# Altium PCB epic2.PcbDoc
Units mm, origin at the board's own origin, x right, y up, seen from the top; angles counter-clockwise.
Board outline 52 x 53 mm, 2 copper layers (Top Layer, Bottom Layer); 61 components, 51 nets, 244 pads, 192 vias.
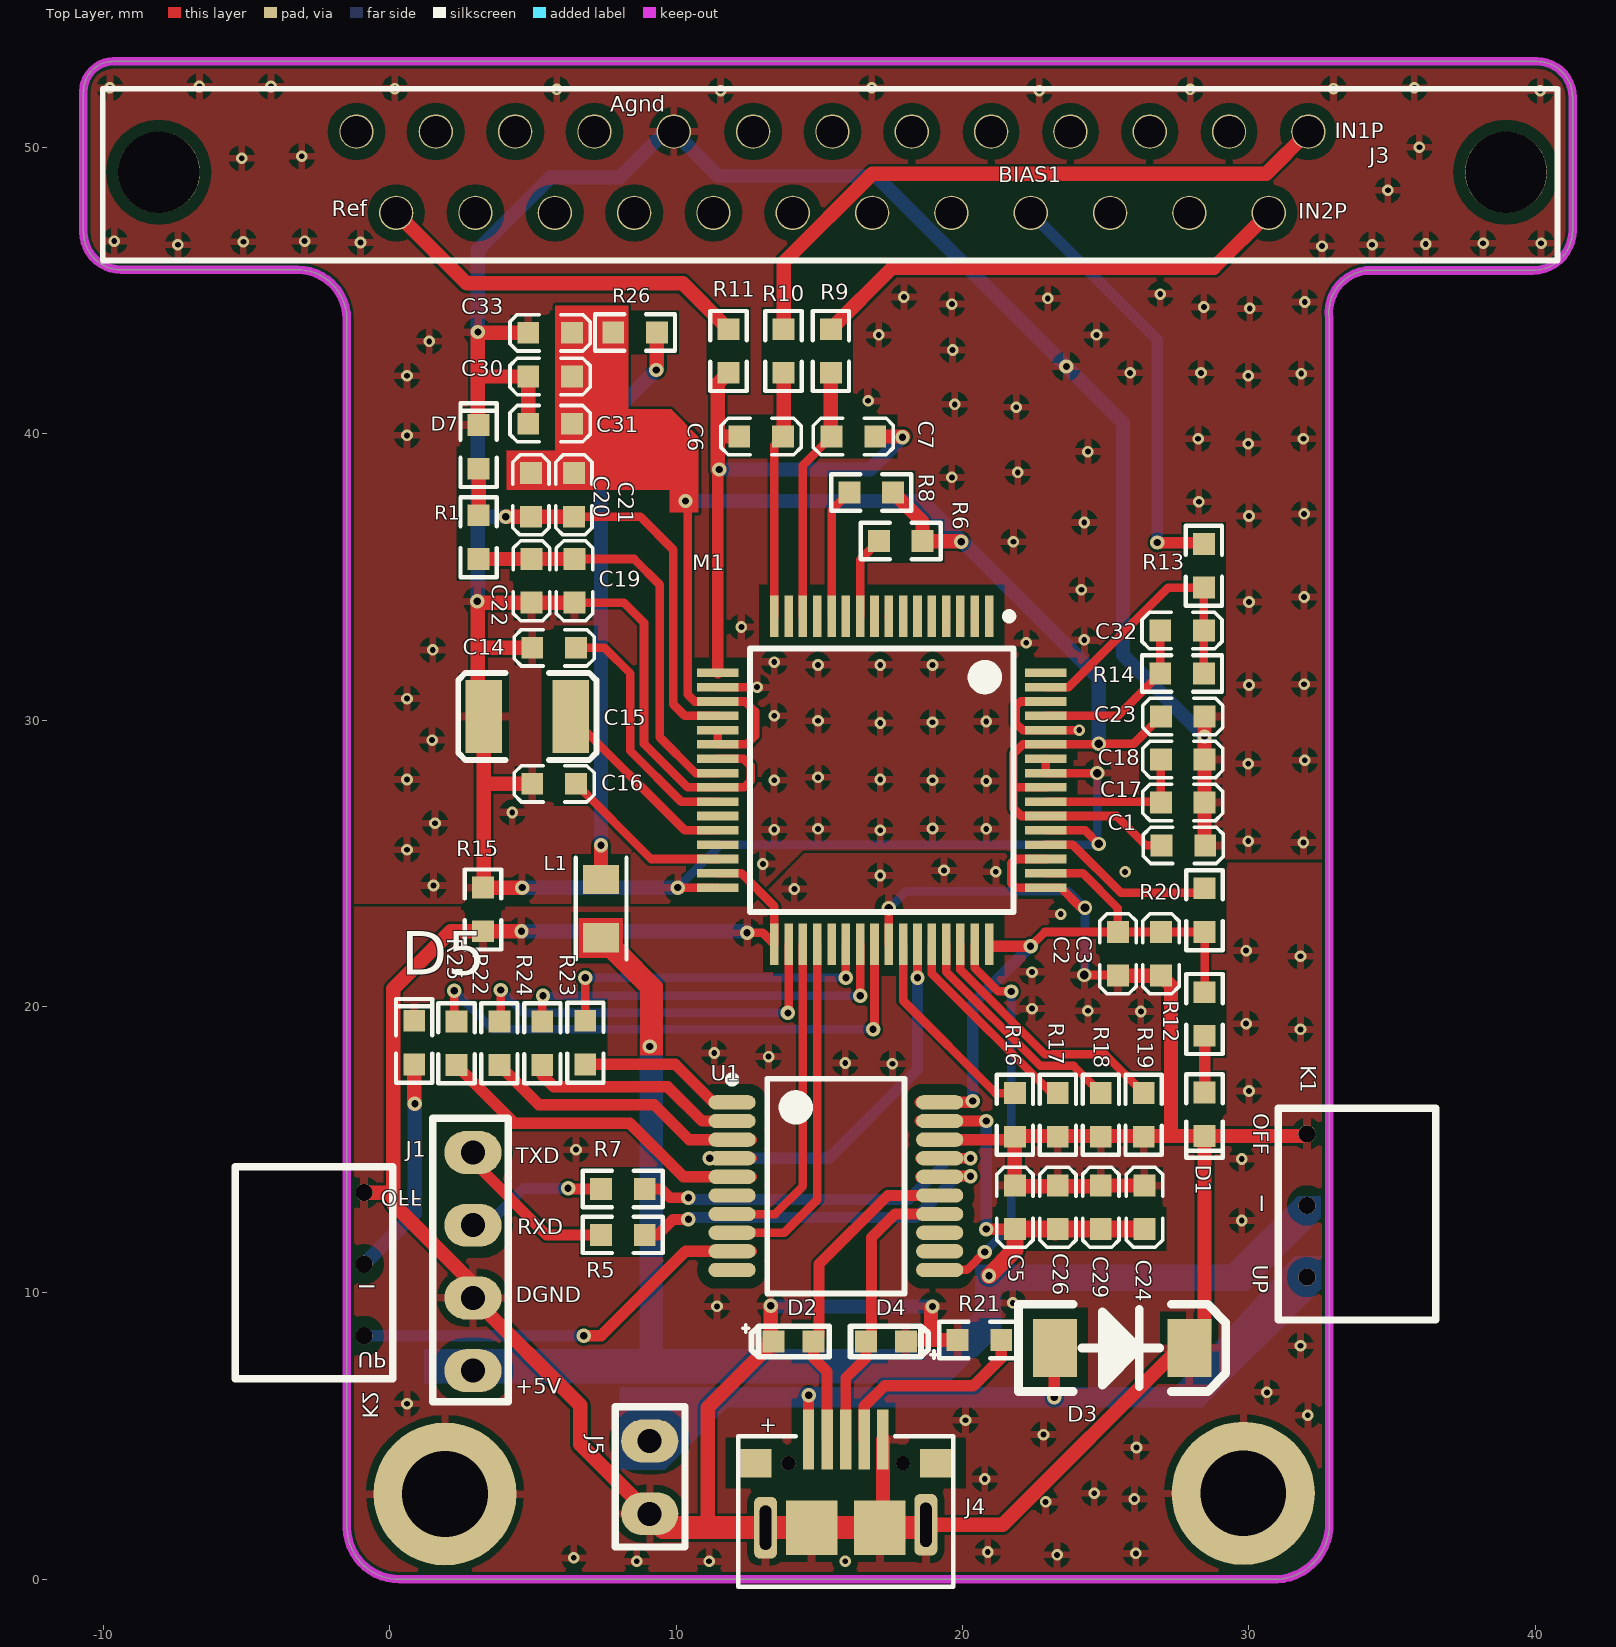
[diagram p0: Top Layer view]
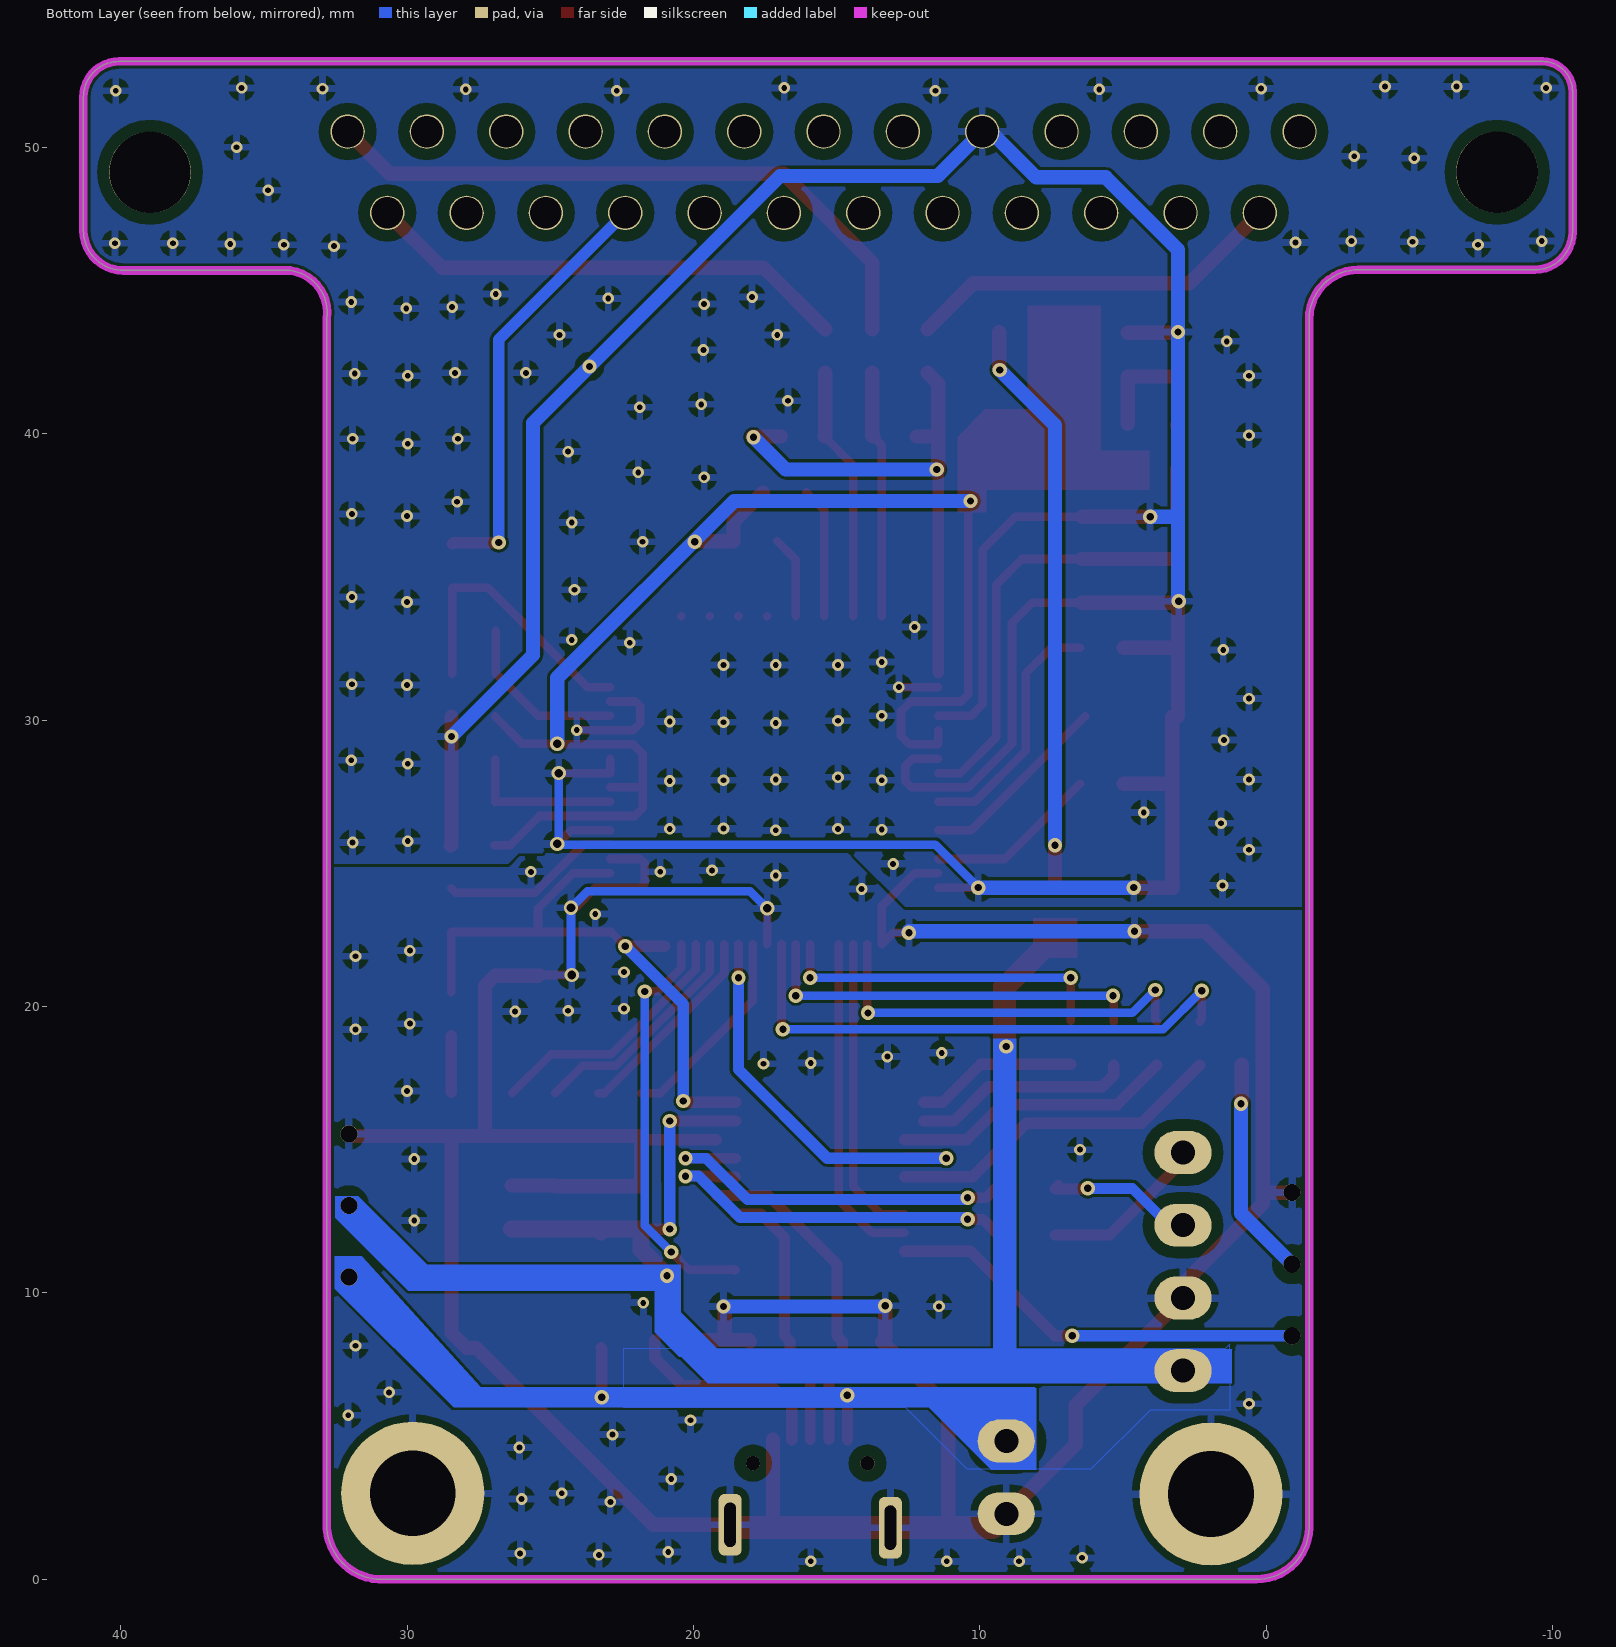
[diagram p1: Bottom Layer view, seen from below]
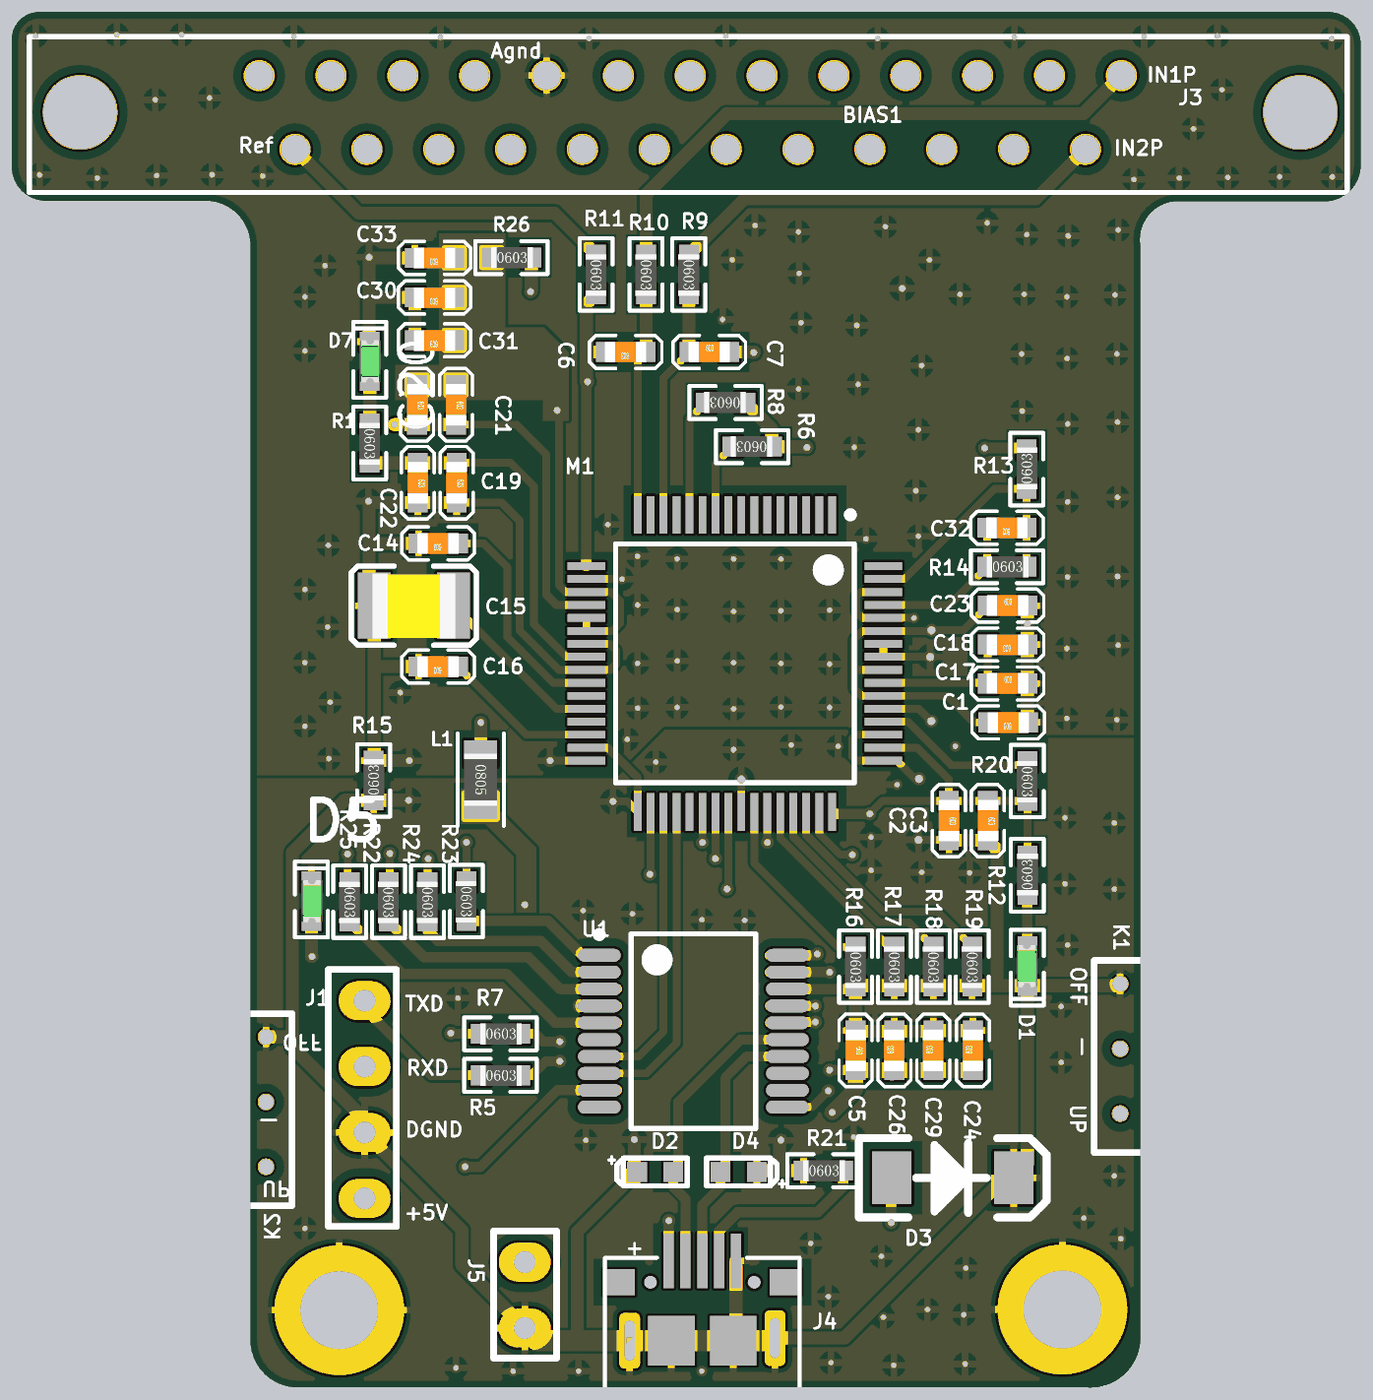
[diagram p2: 3D render of the assembled board from above, using the file's embedded part models]

## Layer stack, top to bottom
Top Solder: solder mask 0.0102, Solder Resist, Dk 3.5
Top Layer: signal copper 0.0356
Dielectric 1: dielectric 0.32, FR-4, Dk 4.8
Bottom Layer: signal copper 0.0356
Bottom Solder: solder mask 0.0102, Solder Resist, Dk 3.5

## Board outline
-1.5,44 ccw(c-3.225,44) -3.225,45.725 -9.375,45.725 cw(c-9.375,47.05) -10.7,47.05 -10.7,51.95 cw(c-9.65,51.95) -9.65,53 40.05,53 cw(c40.05,51.75) 41.3,51.75 41.3,47.1 cw(c39.9,47.1) 39.9,45.7 34.075,45.7 ccw(c34.275,44.225) 32.8,44.025 32.8,1.775 cw(c30.888,1.913) 30.75,0 0.35,0 cw(c0.325,1.825) -1.5,1.8

## Design rules (kind name [scope] priority, off if disabled: settings)
Clearance [All] p1: gap=0.1 except(0.4: SMDPad-Poly THPad-Poly)
HoleToHoleClearance [All] p1: gap=0 allowstackedmicrovias=TRUE
MinimumSolderMaskSliver [All] p1: minsoldermaskwidth=0
PlaneConnect [ISVIA] p1: planeconnectstyle=Relief reliefexpansion=0.508 reliefentries=4 reliefconductorwidth=0.254 reliefairgap=0.254
PolygonConnect [All] p1: connectstyle=Relief reliefconductorwidth=0.254 reliefentries=4 polygonreliefangle="90 Angle" airgapwidth=0.254
RoutingVias [All] p1: holewidth=0.254 width=0.5 viastyle="Through Hole" minholewidth=0.254 minwidth=0.5 maxholewidth=0.3 maxwidth=0.8
SilkToSilkClearance [All] p1: silktosilkclearance=0
SilkToSolderMaskClearance [IsPad] p1: minsilkscreentomaskgap=0 clearancetoexposedcopper=TRUE
SolderMaskExpansion [All] p1: expansion=0.102
Width [All] p1: maxlimit=0.8 minlimit=0.254 preferedwidth=0.5
25 further rules are at their usual default settings.

## Components (designator, comment, footprint, x,y, rotation, side; value= is the part's Value field where it differs from the comment)
C1 "105K16V" C0603 28.473,25.625 r180 top
C2 "104K50V" C0603 25.425,22.601 r270 top
C3 "105K16V" C0603 26.925,22.601 r270 top
C5 "105K16V" C0603 21.825,13.75 r270 top
C6 "101K10V" C0603 13.725,39.9 r180 top
C7 "101K10V" C0603 15.425,39.9 r0 top
C14 "105K16V" C0603 6.499,32.525 r180 top
C15 "100Uf" C1210 6.323,30.125 r180 top
C16 "105K16V" C0603 6.499,27.775 r180 top
C17 "105K16V" C0603 26.925,27.125 r0 top
C18 "104K50V" C0603 28.449,28.625 r180 top
C19 "106K50V" C0603 6.449,35.625 r270 top
C20 "105K16V" C0603 4.925,38.625 r270 top
C21 "104K50V" C0603 6.425,38.625 r270 top
C22 "104K50V" C0603 4.949,35.625 r270 top
C23 "105K16V" C0603 26.925,30.125 r0 top
C24 "106K50V" C0603 26.35,12.226 r90 top
C26 "104K50V" C0603 23.325,12.226 r90 top
C29 "104K50V" C0603 24.825,12.226 r90 top
C30 "103K50V" C0603 6.357,42 r180 top
C31 "106K50V" C0603 6.357,40.35 r180 top
C32 "152K16V" C0603 28.425,33.125 r180 top
C33 "103K50V" C0603 6.357,43.525 r180 top
D1 "LED0603G" D-LED0603G 28.449,16.999 r270 top
D2 "ESDA_TR1/0603" HS_0603D 14.1,8.3 r0 top
D3 "SMAJ5.0CA" DO-214 23.225,8.075 r0 top
D4 "ESDA_TR1/0603" HS_0603D 17.324,8.3 r180 top
D5 "LED0603G" D-LED0603G 0.85,17.976 r90 top
D7 "LED0603G" D-LED0603G 3.1,38.776 r90 top
J1 "J-D2.45-1*4" D2.54-1*4P 2.9,14.9 r270 top
J3 "C-DSUB-25" C-DSUB-25 38.975,49.13 r180 top
J4 "USB-MINI-SOCKET" "MICRO-USB - 5.9" 12.169,-0.257 r0 top
J5 "J-D2.54-1*2" D2.54-1*2P 9.075,4.825 r270 top
K1 "SS-12D00" SS-12D00 32.025,15.55 r270 top
K2 "SS-12D00" SS-12D00 -0.9,13.5 r270 top
L1 "10uH" L0805 7.375,24.432 r270 top
M1 "ADS1299" ADS1299-TSQFP50P1200X1200X105-64N 17.175,27.9 r270 top
R1 "3KF" R0603 3.1,37.15 r270 top
R5 "22RF" R0603 7.376,12.025 r0 top
R6 "10KF" R0603 18.6,36.25 r180 top
R7 "22RF" R0603 7.376,13.625 r0 top
R8 "10KF" R0603 17.575,37.95 r180 top
R9 "10KF" R0603 15.4,43.65 r270 top
R10 "10KF" R0603 13.75,43.65 r270 top
R11 "10KF" R0603 11.825,43.65 r270 top
R12 "2KF" R0603 28.449,18.975 r90 top
R13 "10KF" R0603 28.425,34.625 r90 top
R14 "1MF" R0603 26.901,31.625 r0 top
R15 "0R" R0603 3.25,22.625 r90 top
R16 "10KF" R0603 21.825,16.975 r270 top
R17 "10KF" R0603 23.325,16.975 r270 top
R18 "10KF" R0603 24.825,16.975 r270 top
R19 "10KF" R0603 26.325,16.975 r270 top
R20 "2KF" R0603 28.449,24.125 r270 top
R21 "0R" R0603 19.825,8.35 r0 top
R22 "1KF" R0603 3.825,19.475 r270 top
R23 "1KF" R0603 6.825,19.5 r270 top
R24 "1KF" R0603 5.325,19.475 r270 top
R25 "1KF" R0603 2.325,19.475 r270 top
R26 "1RJ" R0603 7.8,43.538 r0 top
U1 "CH559T" TSSOP20 15.575,13.725 r0 top

## Footprints (in the part's own frame and the unit in brackets; to place one, negate y for a bottom-side part, rotate by r counter-clockwise, add the part's x,y. Pads: shape width x height; smd on the part's side, far side on the other; paste and mask are expansions set on the pad)
ADS1299-TSQFP50P1200X1200X105-64N [mm] "TSQFP, 64-Leads, Body 10.00x10.00mm, Pitch 0.50mm, IPC Medium Density"
  rect 1.45x0.3 smd: 1(-5.725,3.75) 2(-5.725,3.25) 3(-5.725,2.75) 4(-5.725,2.25) 5(-5.725,1.75) 6(-5.725,1.25) 7(-5.725,0.75) 8(-5.725,0.25) 9(-5.725,-0.25) 10(-5.725,-0.75) 11(-5.725,-1.25) 12(-5.725,-1.75) 13(-5.725,-2.25) 14(-5.725,-2.75) 15(-5.725,-3.25) 16(-5.725,-3.75) 33(5.725,-3.75) 34(5.725,-3.25) 35(5.725,-2.75) 36(5.725,-2.25) 37(5.725,-1.75) 38(5.725,-1.25) 39(5.725,-0.75) 40(5.725,-0.25) 41(5.725,0.25) 42(5.725,0.75) 43(5.725,1.25) 44(5.725,1.75) 45(5.725,2.25) 46(5.725,2.75) 47(5.725,3.25) 48(5.725,3.75)
  rect 0.3x1.45 smd: 17(-3.75,-5.725) 18(-3.25,-5.725) 19(-2.75,-5.725) 20(-2.25,-5.725) 21(-1.75,-5.725) 22(-1.25,-5.725) 23(-0.75,-5.725) 24(-0.25,-5.725) 25(0.25,-5.725) 26(0.75,-5.725) 27(1.25,-5.725) 28(1.75,-5.725) 29(2.25,-5.725) 30(2.75,-5.725) 31(3.25,-5.725) 32(3.75,-5.725) 49(3.75,5.725) 50(3.25,5.725) 51(2.75,5.725) 52(2.25,5.725) 53(1.75,5.725) 54(1.25,5.725) 55(0.75,5.725) 56(0.25,5.725) 57(-0.25,5.725) 58(-0.75,5.725) 59(-1.25,5.725) 60(-1.75,5.725) 61(-2.25,5.725) 62(-2.75,5.725) 63(-3.25,5.725) 64(-3.75,5.725)
  silkscreen extent -5.85,-4.6 4.6,4.6, body extent -5,-5 5,5, height 1.05
C0603 [mil]
  rect 30x30 smd: 1(0,0) 2(60,0)
  silkscreen extent -25,-25 85,25, body extent -1,-15 61,16, height 12
C1210 [mil]
  rect 50x100 smd: 1(0,0) 2(120,0)
  silkscreen extent -35,-60 155,60, body extent -3,-48 123,50, height 98
C-DSUB-25 [mm] "C-DSUB-25"
  round 2.85 hole 2.84: 0(0,0) 0(47.04,0)
  round 1.2 hole 1.1: 1(6.9,-1.42) 2(9.67,-1.42) 3(12.44,-1.42) 4(15.21,-1.42) 5(17.98,-1.42) 6(20.75,-1.42) 7(23.52,-1.42) 8(26.29,-1.42) 9(29.06,-1.42) 10(31.83,-1.42) 11(34.6,-1.42) 12(37.37,-1.42) 13(40.14,-1.42) 14(8.285,1.42) 15(11.055,1.42) 16(13.825,1.42) 17(16.595,1.42) 18(19.365,1.42) 19(22.135,1.42) 20(24.905,1.42) 21(27.675,1.42) 22(30.445,1.42) 23(33.215,1.42) 24(35.985,1.42) 25(38.755,1.42)
  silkscreen extent -1.8,-2.92 49,3.08
D2.54-1*2P [mm]
  oval 1.5x2 hole 0.838: 1(0,0) 2(2.54,0)
  silkscreen extent -1.2,-1.2 3.7,1.23, body extent -1.1,-1.3 3.6,1.24, height 10
D2.54-1*4P [mm] "Bluetooth"
  oval 1.5x2 hole 0.838: 1(0,0) 2(2.54,0) 3(5.08,0) 4(7.62,0)
  silkscreen extent -1.2,-1.4 8.7,1.23, body extent -1.1,-1.4 8.7,1.23, height 10
D-LED0603G [mil]
  rect 30x30 smd: 1(0,0) 2(60,0)
  silkscreen extent -25,-25 90,25, body extent -2,-16 62,15, height 24
DO-214 [mil]
  rect 60x80 smd: 1(0,0) 2(185,0)
  silkscreen extent -50,-60 235,60
HS_0603D [mil]
  rect 30x30 smd: 1(-27.5,0) 2(27.5,0)
  silkscreen extent -70,-21 49,23
L0805 [mil]
  rect 40x50 smd: 1(0,0) 2(80,0)
  silkscreen extent -30,-35 110,35, body extent 1,-25 79,25, height 22
"MICRO-USB - 5.9" [mm]
  rect 1.2x1 smd: 0(0.55,4.307) 0(6.95,4.307)
  rect 0.4x2.1 smd: 1(2.45,5.132) 2(3.1,5.132) 3(3.75,5.132) 4(4.4,5.132) 5(5.05,5.132)
  rrect50% 0.8x2.15 hole 0.4 slot 1.55 at 90 deg: 6(0.95,2.057) 6(6.55,2.157)
  rect 1.8x1.9 smd: 6(2.556,2.057) 6(4.943,2.057)
  round 0.5 hole 0.5 unplated: ""(1.75,4.307) ""(5.75,4.307)
  silkscreen extent 0,0 7.5,5.25
R0603 [mil]
  rect 30x30 smd: 1(0,0) 2(60,0)
  silkscreen extent -25,-25 85,25, body extent 0,-16 62,15, height 18
SS-12D00 [mm] "SS-12D00(1P2T) 立式 柄高5MM"
  round 0.6 hole 0.6: 1(0,0) 2(2.5,0) 3(5,0)
  silkscreen extent -0.9,-1 6.5,4.5
TSSOP20 [mm] "SOP, 20-Leads, Body 7.20x5.30mm, Pitch 0.65mm, IPC Medium Density"
  oval 1.65x0.5 smd: 1(-3.625,2.925) 2(-3.625,2.275) 3(-3.625,1.625) 4(-3.625,0.975) 5(-3.625,0.325) 6(-3.625,-0.325) 7(-3.625,-0.975) 8(-3.625,-1.625) 9(-3.625,-2.275) 10(-3.625,-2.925) 11(3.625,-2.925) 12(3.625,-2.275) 13(3.625,-1.625) 14(3.625,-0.975) 15(3.625,-0.325) 16(3.625,0.325) 17(3.625,0.975) 18(3.625,1.625) 19(3.625,2.275) 20(3.625,2.925)
  silkscreen extent -3.75,-3.75 2.4,3.85, body extent -2.8,-3.75 2.8,3.75, height 2

## Part data
C1 C3 C5 C14 C16 C17 C20 C23: library part C0603X7R-105K16V, "贴片电容-陶瓷"
C2 C18 C21 C22 C26 C29: library part C0603X7R-104K50V, "贴片电容-陶瓷"
C6 C7: library part C0603X7R-101K10V, "贴片电容-陶瓷"
C15: library part "C1210钽电容 --100UF--B3528", "C1210-100UF"
C19 C24 C31: library part C0603X7R-106K50V, "贴片电容-陶瓷"
C30 C33: library part C0603X7R-103K50V, "贴片电容-陶瓷"
C32: library part C0603X7R-152K16V, "贴片电容-陶瓷"
D1 D5 D7: library part DLED-0603-G, "贴片二极管-LED"
D2 D4: library part "D Zener", "Zener Diode"
J1: library part J-D2.54-1*4单排排母
J3: "C-DSUB-0064"
J4: library part J-USB-MINI-SOCKET, "USB-A卧式插座"
J5: library part J-D2.54-1*2单排
K1 K2: library part "SS-12D00(1P2T) 立式 柄高5MM"
L1: library part L-0805-10uH, "贴片电感-层叠"
M1: "ADS1299-S-PQFP-64"
R1: library part R0603-3KF, "贴片电阻-通用"
R5 R7: library part R0603-22RF, "贴片电阻-通用"
R6 R8 R9 R10 R11 R13 R16 R17 R18 R19: library part R0603-10KF, "贴片电阻-通用"
R12 R20: library part R0603-2KF, "贴片电阻-通用"
R14: library part R0603-1MF, "贴片电阻-通用"
R15 R21: library part R0603-0R, "贴片电阻-通用"
R22 R23 R24 R25: library part R0603-1KF, "贴片电阻-通用"
R26: library part R0603-1RJ, "贴片电阻-通用"
U1: "usb通信"

## Free pads (board coordinates)
  round 5 hole 3: 0(1.925,2.975) 0(29.8,3)

## Via types
v1: diameter 0.406, hole 0.203, Top Layer to Bottom Layer, tented both sides, 141 vias
v2: diameter 0.5, hole 0.254, Top Layer to Bottom Layer, tented both sides, 44 vias
v3: diameter 0.5, hole 0.3, Top Layer to Bottom Layer, tented both sides, 6 vias
v4: diameter 0.5, hole 0.254, Top Layer to Bottom Layer, 1 vias

## Nets (pads, with @x,y where several pads share a name; then routed paths per layer and width w, separated by ;. In a path a pad name is that pad's centre, name@x,y a point inside that pad or via, vN(x,y) a via of type N, cw(c..) or ccw(c..) an arc to the next point about the centre after c; other vN are vias at no path point)
/CS: R24.2 U1.2 | length 7.6
  Top Layer w0.4: R24.2 5.325,17.6 5.725,17.2 9.7,17.2 10.9,16 U1.2
/DRDY: M1.47 U1.11 | length 14.5
  Top Layer w0.3: U1.11@18.525,10.8 18.55,10.775 18.6,10.825 18.625,10.8 U1.11 20.15,10.8 v2(20.775,11.425) ; M1.47 20.425,21.347 21.247,20.525 v2(21.7,20.525)
  Bottom Layer w0.3: v2(20.775,11.425) 21.7,12.35 v2(21.7,20.525)
/PWDN: M1.35 U1.7 | length 10.7
  Top Layer w0.3: U1.7@12.625,12.75 13.45,12.75 14.425,13.725 M1.35
/RESET: M1.36 U1.8 | length 11.7
  Top Layer w0.3: U1.8@12.625,12.1 13.775,12.1 14.925,13.25 M1.36
AGND: C1.1 C14.2 C15.2 C16.2 C17.2 C18.1 C19.2 C20.2 C21.2 C22.2 C23.2 C30.2 C31.2 C33.2 D7.2 J3.9 M1.18 M1.20 M1.23 M1.25 M1.32 M1.53 M1.57 M1.58 M1.60 M1.62 R15.2 | length 146.1
  Top Layer w0.3: C21.2 8.749,37.101 9.9,35.95 9.9,30.55 10.3,30.15 M1.20 ; C19.2 8.174,34.101 8.875,33.4 8.875,29.175 10.4,27.65 M1.25 12.375,27.65 12.6,27.875 12.6,28.4 12.35,28.65 M1.23 ; v2(10.05,24.15) M1.32 ; M1.18 v1(12.825,31.15) ; M1.53 24.275,26.15 v3(24.75,25.675) ; M1.58 M1.57 v3(24.7,28.15) ; M1.62 22.025,30.65 21.85,30.475 21.85,29.9 22.1,29.65 M1.60 v1(24.075,29.65)
  Top Layer w0.5: C15.2@3.075,30.125 3.075,32.5 ; v2@3.075,34.15 3.075,32.5 ; v2(3.075,43.55) 3.075,42 ; D7.2 3.075,40.325 3.075,42 ; v2@3.124,34.101 C22.2 C19.2 ; v2@3.125,43.525 C33.2 ; C15.2 3.275,27.8 ; v4(4.051,37.101) C20.2 C21.2 ; v2(4.625,24.15) v2(4.625,24.15) R15.2 3.275,24.174 3.275,27.8 ; C31.2 C30.2 3.075,42 ; C16.2 3.3,27.775 3.275,27.8 ; C14.2 3.1,32.525 3.075,32.5 ; C23.2 v2(28.449,29.425) C18.1 C17.2 28.449,25.649 C1.1
  Bottom Layer w0.3: v2(10.05,24.15) 11.55,25.65 v3@24.7,25.65 ; v3(24.7,28.15) v3@24.7,25.65 ; v3(24.75,25.675) 24.725,25.675 v3@24.7,25.65
  Bottom Layer w0.5: v2(3.05,34.15) 3.075,34.175 3.075,37.1 ; v4(4.051,37.101) 4.05,37.1 3.075,37.1 ; v2(4.625,24.15) v2(10.05,24.15) ; v2(28.449,29.425) 25.6,32.274 25.6,40.375 v2(23.625,42.35) 16.975,49 11.465,49 J3.9 9.625,50.55 8.025,48.95 5.6,48.95 3.075,46.425 v2(3.075,43.55) 3.075,37.1
  other v1: 1.525,24.225 13.025,24.975 0.6,25.475 31.9,25.725 29.975,25.775 17.125,26.15 13.425,26.175 14.95,26.2 20.825,26.2 18.95,26.214 1.575,26.4 4.275,26.775 20.825,27.875 13.425,27.9 18.95,27.9 0.6,27.925 17.125,27.925 14.95,28 29.975,28.475 31.95,28.6 1.475,29.3 17.125,29.9 18.95,29.925 20.825,29.95 14.95,29.975 13.425,30.15 0.6,30.75 30,31.225 31.925,31.25 14.95,31.925 17.125,31.925 18.95,31.925 13.425,32.025 1.5,32.45 22.225,32.7 24.25,32.8 12.275,33.25 30,34.125 31.925,34.3 24.15,34.55 21.775,36.225 24.25,36.9 30,37.125 31.925,37.2 28.25,37.625 19.625,38.475 21.925,38.65 24.375,39.375 29.975,39.65 28.225,39.825 31.9,39.825 0.6,39.943 21.875,40.925 19.725,41.025 16.7,41.15 0.6,42.025 29.975,42.025 31.825,42.1 25.85,42.125 28.325,42.125 19.65,42.925 1.375,43.225 17.075,43.45 24.675,43.45 30.025,44.375 28.425,44.425 19.625,44.525 31.95,44.6 22.975,44.725 17.95,44.775 26.9,44.875 32.55,46.55 -7.4,46.6 34.3,46.6 36.175,46.625 38.175,46.65 40.2,46.65 -1.025,46.675 -5.116,46.702 -9.623,46.727 -2.977,46.727 34.85,48.5 -5.173,49.616 -3.077,49.691 35.95,50 11.55,51.975 22.675,51.975 40.173,51.973 5.825,52.025 27.95,52.025 0.175,52.05 32.95,52.05 -9.775,52.075 16.825,52.075 35.775,52.075 -6.65,52.125 -4.15,52.125
AVCC: C1.2 C20.1 C21.1 C23.1 C30.1 C31.1 C33.1 M1.19 M1.21 M1.22 M1.54 M1.56 M1.59 R6.1 R8.1 R26.1 | length 63.5
  Top Layer w0.3: v2(10.325,37.65) 10.4,37.575 10.4,30.897 10.647,30.65 M1.19 12.4,30.65 12.75,30.3 12.75,29.45 12.45,29.15 M1.22 M1.21 ; M1.56 21.8,27.65 21.775,27.625 ; C23.1 25.975,29.175 v3(24.75,29.175) 24.725,29.15 M1.59 22.097,29.15 21.775,28.828 21.775,27.625 ; C1.2 26.4,25.625 25.375,26.65 M1.54 22.05,26.65 21.775,26.925 21.775,27.625
  Top Layer w0.5: C20.1 C21.1 6.357,38.693 C31.1 ; 6.358,41.501 6.357,41.5 ; C30.1@6.425,41.901 C30.1@6.499,41.975 ; R26.1 6.37,43.538 C33.1 C30.1 6.357,41.5 ; v2(10.325,37.65) 10.325,39.425 9.4,40.35 C31.1 ; R8.1 18.6,36.925 R6.1 19.95,36.25 v2(19.95,36.225) ; C31.1 6.357,41.5
  Bottom Layer w0.5: v2(10.325,37.65) 18.575,37.65 24.75,31.475 v3(24.75,29.175)
BIAS1: J3.17 R13.2 | length 15
  Top Layer w0.4: v2(26.8,36.2) 28.374,36.2 R13.2
  Bottom Layer w0.4: J3.17 26.8,43.29 v2(26.8,36.2)
BIASINV: C32.2 M1.61 R14.1 | length 6.1
  Top Layer w0.3: M1.61 25.426,30.15 R14.1 C32.2
BIASOUT: C32.1 M1.63 R13.1 R14.2 | length 10
  Top Layer w0.3: M1.63 23.703,31.15 27.178,34.625 R13.1 C32.1 R14.2
CLKSEL: M1.52 R20.1 | length 6.3
  Top Layer w0.3: M1.52 23.85,25.65 25.525,23.975 28.299,23.975 R20.1
DGND: C2.2 C3.2 C5.1 C24.2 C26.2 C29.2 D1.2 D2.1 D3.2 D4.1 D5.2 J1.3 J4.5 J4.6 J5.2 K1.1 K2.1 M1.31 M1.33 M1.41 M1.49 M1.51 pad.0 R15.1 R16.2 R17.2 R18.2 R19.2 R21.1 U1.18 | length 134.5
  Top Layer w0.3: M1.31 12.275,24.65 13.425,23.5 M1.33 13.025,22.575 v2(12.475,22.575) ; M1.41 v3(17.425,23.425) ; M1.51 21.85,25.15 21.7,25 21.7,24.3 21.85,24.15 M1.49 23.425,24.15 24.125,23.45 v3(24.275,23.45) ; v3(24.25,21.1) 25.252,21.1 25.327,21.175 C2.2
  Top Layer w0.4: U1.18 21.724,15.35 R16.2
  Top Layer w0.5: K2.1 0.094,13.5 0.119,13.525 ; J1.3@2.845,9.875 2.845,10.38 0.119,13.106 0.119,13.525 ; J1.3 6.65,6.07 6.65,4.71 J5.2 ; v2(4.6,22.625) R15.1 2.125,22.625 0.119,20.619 0.119,13.525 ; 11.1,1.8 11.1,5.998 D2.1 13.3,8.402 v2(13.3,9.55) ; J4.6@17.113,1.8 17.219,1.907 J4.5 ; D4.1 18.072,8.35 18.9,8.35 ; J4.6@18.719,1.9 21.4,1.9 27.575,8.075 D3.2 28.449,8.6 D1.2 ; v2(18.95,9.525) 18.9,9.475 18.9,8.35 ; R21.1 18.9,8.35 ; C29.2@24.825,13.725 21.849,13.725 C5.1 R16.2 21.849,15.475 27.275,15.475 ; C29.2 C24.2 ; C2.2 C3.2 27.275,20.727 27.275,15.475 ; K1.1 31.95,15.475 D1.2 ; 27.275,15.475 D1.2
  Top Layer w0.8: J1.3@2.845,9.875 J1.3 ; J5.2 9.56,1.8 11.1,1.8 13.119,1.8 14.725,1.8 17.113,1.8 18.619,1.8 J4.6@18.719,1.9
  Bottom Layer w0.3: v2(12.475,22.575) v2@12.475,22.625 ; v3(17.425,23.425) 18.025,24.025 23.7,24.025 v3(24.275,23.45) 24.275,21.125 v3(24.25,21.1)
  Bottom Layer w0.5: v2(4.6,22.625) v2@12.475,22.625 ; v2(13.3,9.55) 13.325,9.525 v2(18.95,9.525)
  other v1: 8.625,0.625 11.15,0.625 15.9,0.625 6.425,0.75 23.3,0.85 26.05,0.9 20.877,0.952 22.9,2.7 26,2.8 24.6,3 20.775,3.5 26.075,4.6 22.825,5.05 20.1,5.55 32.05,5.725 0.6,6.125 30.625,6.525 31.8,8.15 11.425,9.525 21.75,9.65 29.75,12.525 29.75,14.675 6.5,15 30,17.05 17.55,18 15.9,18.025 13.225,18.25 11.325,18.375 31.8,19.2 29.9,19.4 26.225,19.825 24.375,19.85 22.425,19.925 22.425,21.2 31.8,21.75 29.9,21.95 23.425,23.225 14.125,24.1 17.125,24.575 21.155,24.703 25.675,24.7 19.35,24.75
DIN: R22.2 U1.3 | length 9.9
  Top Layer w0.4: R22.2 5.201,16.575 9.225,16.575 10.45,15.35 U1.3 U1.3@12.625,15.35
DM: D2.2 J4.2 U1.15 | length 11.6
  Top Layer w0.381: J4.2 15.269,7.258 14.799,7.729 D2.2 14.989,8.491 14.989,11.003 17.386,13.4 U1.15
DOUT: M1.43 U1.4 | length 14.4
  Top Layer w0.3: v2(18.425,21) M1.43
  Top Layer w0.4: v2(11.175,14.7) U1.4 U1.4@12.625,14.7
  Bottom Layer w0.4: v2(11.175,14.7) 15.325,14.7 18.425,17.8 v2(18.425,21)
DP: D4.2 J4.3 U1.14 | length 9.5
  Top Layer w0.381: J4.3 15.919,7.023 16.625,7.729 D4.2 16.816,8.491 16.816,11.931 17.635,12.75 U1.14@18.525,12.75
DVCC: C5.2 C24.1 C26.1 C29.1 J1.4 K1.2 L1.2 U1.19 | length 62.1
  Top Layer w0.4: U1.19@18.525,16 U1.19 v2(20.825,16) ; v2(20.825,12.225) 21.824,12.225 C5.2
  Top Layer w0.5: L1.2 9.075,20.7 v2(9.075,18.6)
  Top Layer w0.6: v2(20.925,10.6) 21.825,11.5 C5.2 C26.1 ; C26.1@23.225,12.126 C26.1 ; C24.1 C29.1 C26.1
  Bottom Layer w0.4: v2(20.825,12.225) 20.825,13.847 20.826,13.848 v2(20.825,16) ; v2(20.825,16) v2(20.825,16)
  Bottom Layer w0.5: 9.075,7.3 v2(9.075,18.6)
  Bottom Layer w0.6: J1.4 9.055,7.28 ; 9.075,7.3 9.055,7.28 ; K1.2 29.575,10.6 v2(20.925,10.6) 20.925,8.825 19.38,7.28 9.055,7.28
GPIO1: M1.42 R16.1 | length 7.2
  Top Layer w0.3: M1.42 17.925,20.2 21.15,16.975 R16.1
GPIO2: M1.44 R17.1 | length 7.2
  Top Layer w0.3: M1.44 18.925,21.15 23.1,16.975 R17.1
GPIO3: M1.45 R18.1 | length 8.1
  Top Layer w0.3: M1.45 19.425,21.216 22.716,17.925 23.875,17.925 R18.1
GPIO4: M1.46 R19.1 | length 9.1
  Top Layer w0.3: M1.46 19.925,21.281 22.881,18.325 24.975,18.325 R19.1
IN1P: J3.1 R10.1 | length 22.5
  Top Layer w0.5: R10.1 13.75,45.975 16.85,49.075 30.6,49.075 J3.1
IN2P: J3.14 R9.1 | length 17
  Top Layer w0.5: R9.1 17.55,45.8 28.78,45.8 J3.14
NetC6_1: C6.1 M1.16 R10.2 | length 8.6
  Top Layer w0.3: M1.16 13.425,39.6 C6.1
  Top Layer w0.5: C6.1 13.75,39.925 R10.2
NetC6_2: C6.2 C7.2 M1.17 R11.2 | length 19.3
  Top Layer w0.4: M1.17 v2@11.45,38.725
  Top Layer w0.5: v2@11.45,38.75 11.45,39.85 ; v2@11.475,38.725 v2(11.5,38.75) ; R11.2 11.45,41.751 11.45,39.85 ; C6.2 11.5,39.9 11.45,39.85 ; C7.2 17.925,39.9 v2(17.9,39.875)
  Bottom Layer w0.5: v2(11.5,38.75) 16.775,38.75 v2(17.9,39.875)
NetC7_1: C7.1 M1.14 R9.2 | length 8.9
  Top Layer w0.3: M1.14 14.425,38.9 C7.1
  Top Layer w0.5: R9.2 15.4,39.925 C7.1
NetC14_1: C14.1 M1.26 | length 8.8
  Top Layer w0.3: C14.1 7.5,32.525 8.4,31.625 8.4,28.925 10.175,27.15 M1.26
NetC15_1: C15.1 M1.28 | length 6.8
  Top Layer w0.3: C15.1 10.298,26.15 M1.28
NetC16_1: C16.1 M1.30 | length 6
  Top Layer w0.3: C16.1 9.124,25.15 M1.30
NetC17_1: C17.1 C18.2 M1.55 | length 5.5
  Top Layer w0.3: M1.55 22.905,27.155 26.895,27.155 C17.1 C18.2
NetD1_1: D1.1 R12.1 | length 2
  Top Layer w0.4: D1.1 R12.1
NetD5_1: D5.1 K2.2 | length 7.7
  Top Layer w0.5: D5.1 0.85,16.625 v2(0.875,16.6)
  Bottom Layer w0.5: K2.2 0.875,12.775 v2(0.875,16.6)
NetD7_1: D7.1 R1.1 | length 1.6
  Top Layer w0.5: R1.1 D7.1
NetJ1_1: J1.1 R5.1 | length 5.8
  Top Layer w0.381: J1.1 2.9,14.6 5.475,12.025 R5.1
NetJ1_2: J1.2 R7.1 | length 5.2
  Top Layer w0.381: v2(6.225,13.65) 6.25,13.625 R7.1 R7.1@7.251,13.75
  Bottom Layer w0.381: J1.2 3.385,12.36 4.675,13.65 v2(6.225,13.65)
NetJ4_4: J4.4 R21.2 | length 7.3
  Top Layer w0.4: J4.4 16.569,6.044 17.275,6.75 20.375,6.75 21.349,7.724 R21.2
NetL1_1: L1.1 R26.2 | length 19.9
  Top Layer w0.5: L1.1 v2(7.375,25.625) ; v2(9.3,42.225) 9.324,42.249 R26.2
  Bottom Layer w0.5: v2(7.375,25.625) 7.375,40.3 v2(9.3,42.225)
NetM1_10: M1.10 R6.2 | length 2.9
  Top Layer w0.3: M1.10 16.425,35.599 R6.2
NetM1_12: M1.12 R8.2 | length 4.6
  Top Layer w0.3: M1.12 15.425,37.324 R8.2
NetM1_34: M1.34 R22.1 | length 13.9
  Top Layer w0.3: R22.1 3.875,19.525 v2(3.875,20.575) ; v2(13.9,19.775) 13.925,19.8 M1.34
  Bottom Layer w0.3: v2(3.875,20.575) 4.675,19.775 v2(13.9,19.775)
NetM1_38: M1.38 R23.1 | length 11.8
  Top Layer w0.3: R23.1 v2(6.825,21) ; v2(15.925,21) M1.38
  Bottom Layer w0.3: v2(6.825,21) v2(15.925,21)
NetM1_39: M1.39 R24.1 | length 13.8
  Top Layer w0.3: R24.1 5.325,20.35 v2(5.35,20.375) ; v2(16.425,20.375) M1.39
  Bottom Layer w0.3: v2(5.35,20.375) v2(16.425,20.375)
NetM1_40: M1.40 R25.1 | length 19.3
  Top Layer w0.3: v2(2.25,20.55) 2.25,19.55 R25.1 ; v2(16.875,19.2) 16.95,19.275 16.925,19.3 M1.40
  Bottom Layer w0.3: v2(2.25,20.55) 3.6,19.2 v2(16.875,19.2)
REFER: J3.25 R11.1 | length 13.3
  Top Layer w0.5: J3.25 2.68,45.25 10.225,45.25 R11.1
RXD: R7.2 U1.17 | length 13.9
  Top Layer w0.381: R7.2 9.472,13.625 9.777,13.319 v2(10.425,13.319) ; U1.17@18.525,14.7 U1.17 v2(20.275,14.7)
  Bottom Layer w0.381: v2(10.425,13.319) 10.485,13.26 18.114,13.26 19.554,14.7 v2(20.275,14.7)
SCLK: R25.2 U1.5 | length 11.9
  Top Layer w0.4: R25.2 4.351,15.925 8.375,15.925 10.25,14.05 U1.5 U1.5@12.625,14.05
START: R23.2 U1.1 | length 5.7
  Top Layer w0.4: R23.2 9.974,17.976 11.3,16.65 U1.1
TXD: R5.2 U1.16 | length 14
  Top Layer w0.381: R5.2 9.35,12.025 9.891,12.565 v2(10.425,12.565) ; U1.16@18.525,14.05 U1.16 19.226,14.076 v2(20.276,14.076)
  Bottom Layer w0.381: v2(10.425,12.565) 10.485,12.625 18.377,12.625 19.828,14.076 v2(20.276,14.076)
VCC: D3.1 J4.1 J5.1 K1.3 | length 28.7
  Top Layer w0.4: J4.1 14.619,6.419 v2(14.625,6.425) ; v2(23.2,6.35) 23.2,8.05 D3.1
  Bottom Layer w0.4: J5.1 10.675,6.425 v2(14.625,6.425) 23.125,6.425 v2(23.2,6.35)
  Bottom Layer w0.5: v2(23.2,6.35) 27.825,6.35 K1.3
VCC_3V3: C2.1 C3.1 M1.48 M1.50 R12.2 R20.2 U1.20 | length 21.7
  Top Layer w0.3: v2(22.375,22.1) 22.876,22.601 C2.1 ; M1.50 24.2,24.65 25.425,23.425 C2.1 ; R12.2 R20.2 C2.1
  Top Layer w0.4: U1.20@18.525,16.65 U1.20 20.3,16.65 v2(20.35,16.7) ; M1.48@21,22.1 v2(22.375,22.1)
  Bottom Layer w0.4: v2(20.35,16.7) 20.35,20.075 v2(22.375,22.1)
VREFP: C19.1 C22.1 M1.24 R1.2 | length 14.6
  Top Layer w0.3: C19.1 8.525,35.625 9.425,34.725 9.425,29.4 10.675,28.15 M1.24
  Top Layer w0.5: R1.2 R1.2 C22.1 C19.1
XI/SCS_: K2.3 U1.9 | length 14.7
  Top Layer w0.4: v2(6.775,8.5) 7.375,8.5 10.325,11.45 U1.9 U1.9@12.625,11.45
  Bottom Layer w0.4: K2.3 v2(6.775,8.5)
pads on no net: J3.0 J3.2 J3.3 J3.4 J3.5 J3.6 J3.7 J3.8 J3.10 J3.11 J3.12 J3.13 J3.15 J3.16 J3.18 J3.19 J3.20 J3.21 J3.22 J3.23 J3.24 J4. J4.0 M1.1 M1.2 M1.3 M1.4 M1.5 M1.6 M1.7 M1.8 M1.9 M1.11 M1.13 M1.15 M1.27 M1.29 M1.37 M1.64 U1.6 U1.10 U1.12 U1.13
copper on no net: | length 0

## Polygon pours and split planes (outlines as drawn)
DGND on Bottom Layer "top" (solid, remove dead copper, pour order 28): 32.8,25.025 26.425,25.025 26.1,25.35 14.475,25.35 14.393,25.268 12.6,23.475 12.584,23.475 -1.5,23.475 -1.5,1.528 -1,0.75 -0.5,0.25 0,0 1.75,0 1.85,0 29.45,0 30.025,0 30.526,0.029 31.643,0.15 32.362,0.686 32.8,1.65
AGND on Bottom Layer "top" (solid, remove dead copper, pour order 24): 29.675,53 19.675,53 9.65,53 -9.679,53 -10.184,52.854 -10.7,52.338 -10.7,49.425 -10.7,47.525 -10.7,46.525 -9.909,45.734 -2.75,45.734 -2.018,45.232 -1.758,44.742 -1.5,44 -1.5,23.475 0,23.475 12.6,23.475 14.475,25.35 26.1,25.35 26.473,24.977 30.925,24.977 32.82,24.977 32.82,44.537 33.315,45.362 34.075,45.7 36.301,45.674 38.825,45.674 40.163,45.725 40.925,46.001 41.3,46.862 41.327,47.825 41.3,49.65 41.264,52.047 41.153,52.338 40.925,52.643 40.568,53 40.05,53
DVCC on Bottom Layer "top" (solid, remove dead copper, pour order 54): 1.275,8.2 1.425,8.05 22.45,8.05 22.45,6 12.6,6 10.45,3.85 6.1,3.85 4.025,5.925 1.25,5.925
DGND on Top Layer "top" (solid, remove dead copper, pour order 26): 32.8,25.025 26.425,25.025 26.1,25.35 14.475,25.35 12.6,23.475 -1.5,23.475 -1.5,1.25 -0.5,0 1.4,0 20.812,0 28.725,0 29.675,0 30.502,0.034 31.259,0.034 31.97,0.33 32.47,0.83 32.8,1.575
AGND on Top Layer "top" (solid, remove dead copper, pour order 56): 0.088,23.497 12.688,23.497 14.563,25.372 14.888,25.047 32.8,25.047 32.8,44.425 32.888,44.955 33.267,45.335 33.709,45.608 34.163,45.722 34.075,45.7 40.248,45.608 40.938,46.161 41.388,46.747 41.388,47.147 41.388,51.772 41.058,52.618 40.627,52.922 40.138,53.022 -9.562,53.022 -9.966,53.022 -10.362,52.772 -10.612,52.376 -10.612,46.522 -9.837,45.747 -3.225,45.725 -2.018,45.232 -1.5,44.556 -1.5,43.75 -1.5,23.497

## Keep-outs
Keep-Out Layer:
  the board outline again, w0.3

## Other copper
Top Layer:
  region net AVCC: 8.325,44.475 5.775,44.475 5.775,39.425 5.75,39.4 4.1,39.4 4.075,39.425 4.075,38.05 9.775,38.05 9.775,37.25 10.775,37.25 10.775,39.9 9.825,40.85 8.325,40.85
  region net DVCC: 6.6,23.075 6.6,21.7 7.575,21.7 8.75,20.525 8.75,18.3 9.525,18.3 9.525,20.8 8.125,22.2 8.125,23.075
Bottom Layer:
  region net DVCC: 8.725,18.875 8.725,8.05 8.7,8.025 9.525,8.025 9.525,18.875
  region net DVCC: 32.5,13.375 32.5,12.625 29.95,10.075 21.35,10.075 21.35,8.625 20.5,7.775 20.425,7.775 19.5,6.85 14.9,6.85 10.375,6.85 1.2,6.85 1.2,8 1.175,8.025 19.15,8.025 20.45,9.325 20.45,10.975 29.3,10.975 31.7,13.375
  region net VCC: 8.025,6.675 8.025,3.825 9.6,3.825 11.775,6 28.375,6 32.525,10.15 32.525,11.175 32.525,11.275 31.575,11.275 27.425,6.7 8.075,6.7

## Silkscreen, mask and mechanical layers (free items; w line width, h text height)
Top Overlay:
  text "Agnd" at 7.7,51.25 h0.55
  text "IN1P" at 33,50.325 h0.55
  text "BIAS1" at 21.25,48.775 h0.55
  text "Ref" at -2.025,47.6 h0.55
  text "IN2P" at 31.725,47.5 h0.55
  text "TXD" at 4.4,14.525 h0.55
  text "RXD" at 4.45,12.05 h0.55
  text "DGND" at 4.4,9.675 h0.55
  text "+5V" at 4.375,6.475 h0.55

## Dimensions
-10.7,51.95 to 41.3,51.75 on Keep-Out Layer
-9.65,53 to 0.35,0 on Keep-Out Layer

## Text inside footprints (layer, text, board x,y; h text height)
J4: Top Overlay "+" at 12.906,5.127 h0.55
K1: Top Overlay "OFF" at 30.15,16.275 h0.55 r270; Top Overlay "I" at 30.35,12.85 h0.55; Top Overlay "UP" at 30.125,10.975 h0.55 r270
K2: Top Overlay "UP" at -1.125,7.925 h0.55 r180; Top Overlay "I" at -1.075,10.1 h0.55 r270; Top Overlay "OFF" at -0.325,13.575 h0.55 r180